# EAGLE board cadiz_mb_20140206_4_5033-69s_2_polygoned (EAGLE 6.1)
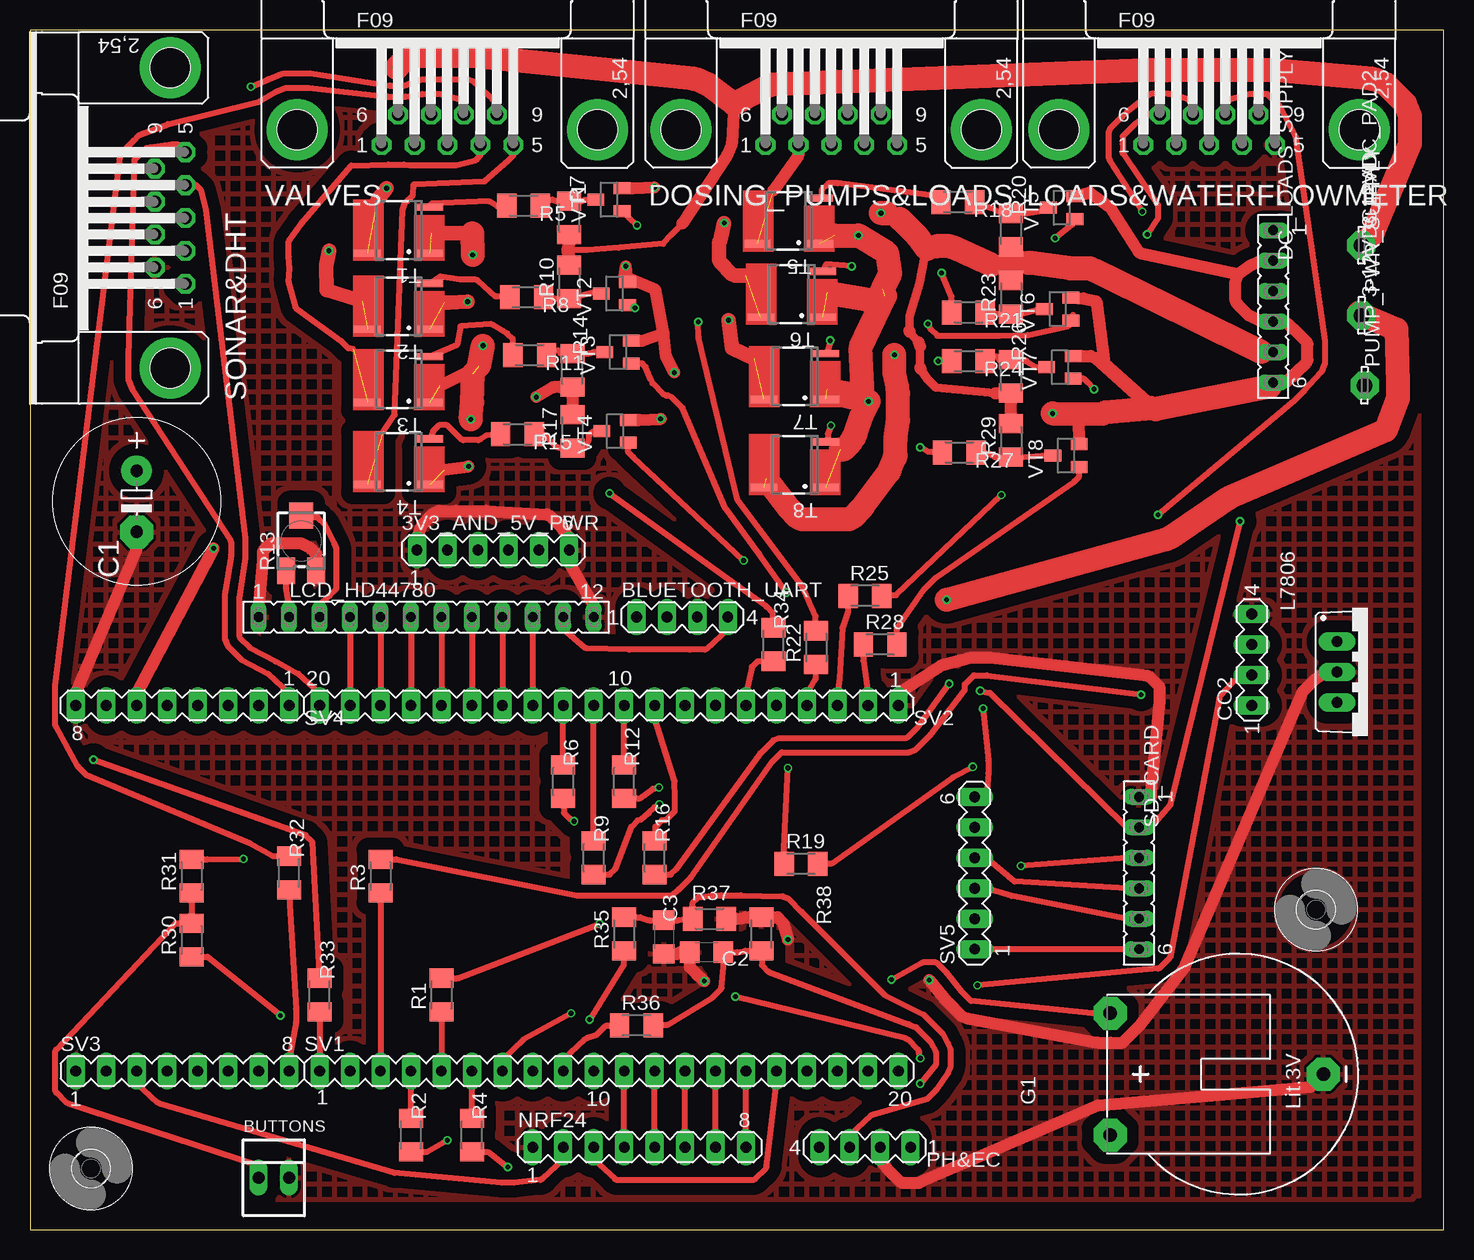
[diagram p0: board, top side]
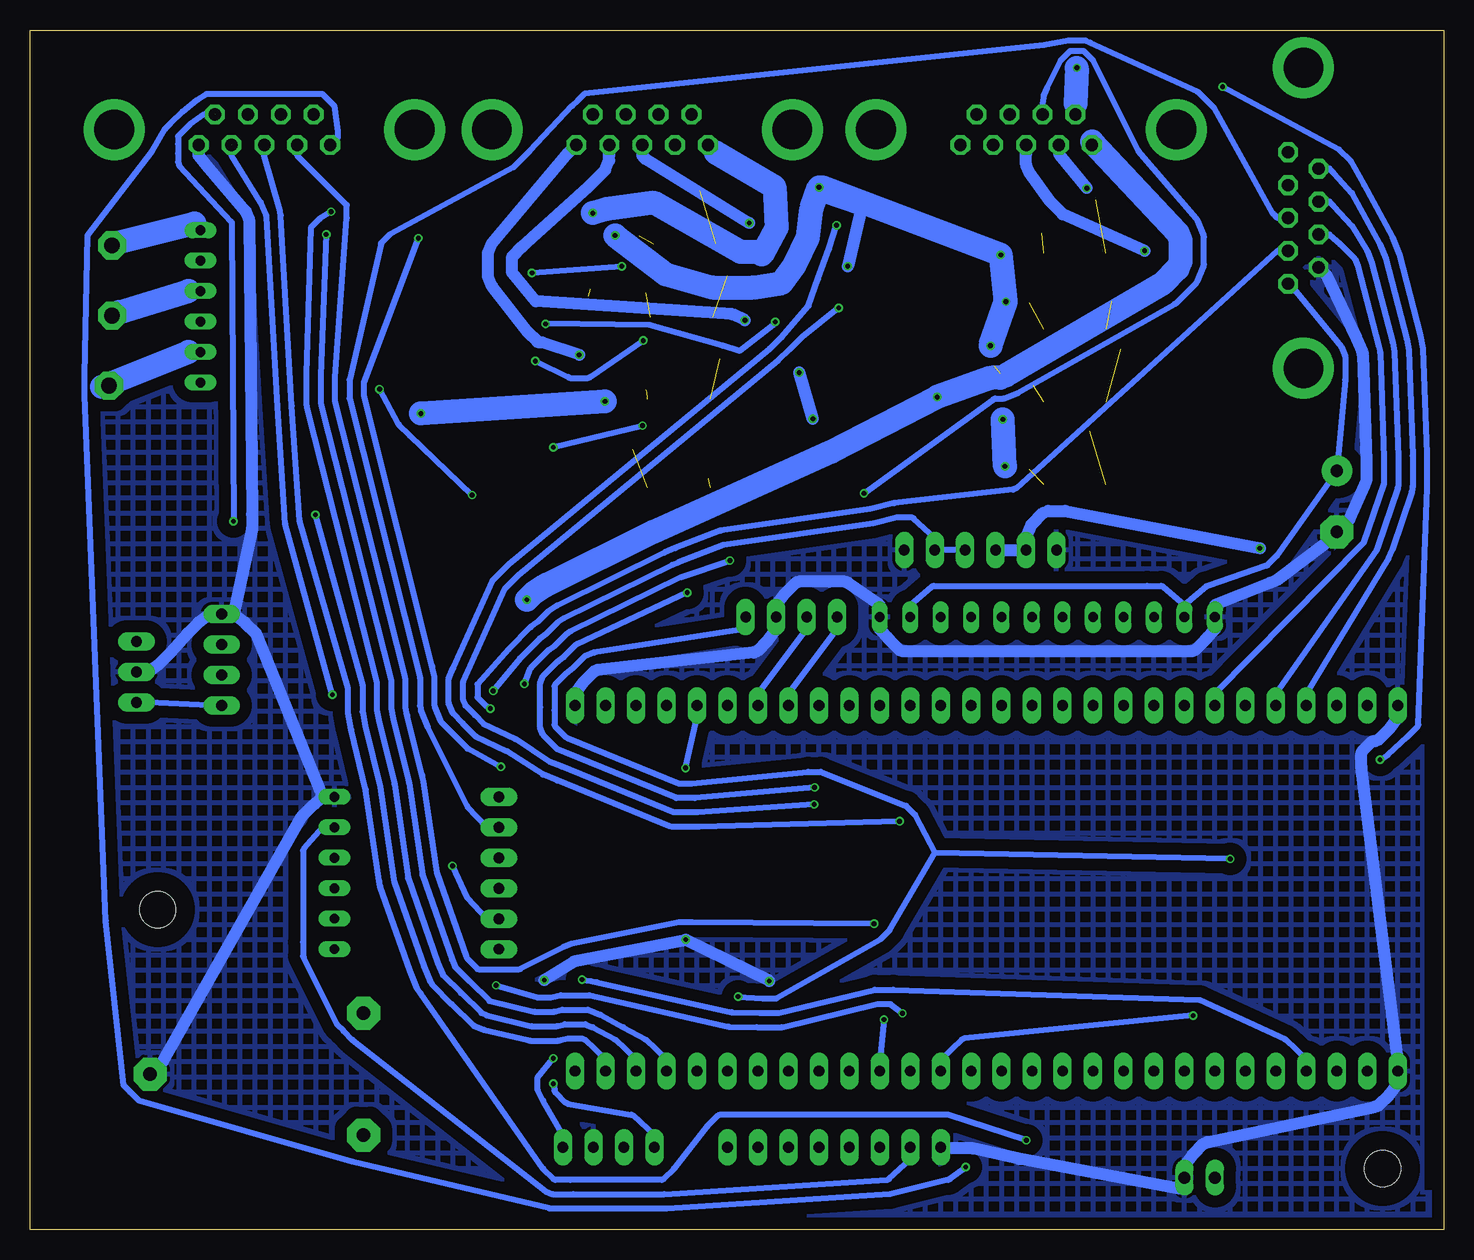
[diagram p1: board, bottom side, seen from below]

Size 117.84 x 100 mm. Coordinates in mm from the lower left corner, seen from the top.
Outline: 0,0 117.84,0 117.84,100 0,100 0,0
Copper layers 1+16: Top 0.035mm / dielectric 0.15mm / Bottom 0.035mm
Design rules: minimum track width 0.5mm, minimum drill 0.6mm, track to track 0.7mm, track to pad 8mil, pad to pad 8mil, via to via 8mil, smd to smd 8mil, copper to edge 1mm, drill to drill 8mil, minimum pad ring 0.1mm, minimum via ring 0.1mm, stop-mask expansion 4mil, vias tented up to drill 0mil, thermal gap 10mil
Net classes: 0 default: width 0.5 mm, clearance 0.7 mm; 1 48A: width 0.5 mm, clearance 0.7 mm to class 0, clearance 0.7 mm; 2 16A: width 0.5 mm, clearance 0.7 mm to class 0, clearance 0.7 mm to class 1, clearance 0.7 mm; 3 1A: width 1 mm, clearance 0.7 mm to class 0, clearance 0.7 mm to class 1, clearance 0.7 mm to class 2, clearance 1 mm; 4 3A: width 2 mm, clearance 0.7 mm to class 0, clearance 0.7 mm to class 1, clearance 0.7 mm to class 2, clearance 0.7 mm to class 3, clearance 1 mm

## Footprints (pad centres in the part's own frame; a part is rotated, then mirrored left to right if it is on the bottom)
SOLPAD$ = drill 1.321 pad 2.337 octagon: MP 0,0
CON-LSTB$ = drill 0.9 pad 1.524 long: 1 -6.35,0; 2 -3.81,0; 3 -1.27,0; 4 1.27,0; 5 3.81,0; 6 6.35,0
CON-LSTB$' = drill 0.9 pad 1.524 long: 1 -3.81,0; 2 -1.27,0; 3 1.27,0; 4 3.81,0
CON-MOLEX$ = drill 1 pad 1.508 long: 1 -1.27,0; 2 1.27,0
RCL$ = drill 1.016 pad 2.54: + -2.54,0 | drill 1.016 pad 2.749 octagon: - 2.54,0
RESISTOR$ = smd 1.6 x 1.8: 1 -1.4,0; 2 1.4,0
CON-LSTA$ = drill 0.813 pad 1.321 long: 1 -6.35,0; 2 -3.81,0; 3 -1.27,0; 4 1.27,0; 5 3.81,0; 6 6.35,0
CON-SUBD$ = drill 1.016 pad 1.649 octagon: 1 -5.486,-1.27; 2 -2.743,-1.27; 3 0,-1.27; 4 2.743,-1.27; 5 5.486,-1.27; 6 -4.115,1.27; 7 -1.372,1.27; 8 1.372,1.27; 9 4.115,1.27 | drill 3.302 pad 5.08: G1 -12.522,0; G2 12.522,0
BATTERY$ = drill 1.118 pad 2.749 octagon: + 5.08,10.795; +@1 -5.08,10.795; - 0,-6.985
HOLES$ = hole 3: 0,0
L78XX$ = drill 0.9 pad 1.524 long: GND 0,0; IN -2.54,0; OUT 2.54,0
CON-LSTA$' = drill 0.813 pad 1.321 long: 1 -13.97,0; 2 -11.43,0; 3 -8.89,0; 4 -6.35,0; 5 -3.81,0; 6 -1.27,0; 7 1.27,0; 8 3.81,0; 9 6.35,0; 10 8.89,0; 11 11.43,0; 12 13.97,0
CON-LSTB$'' = drill 0.9 pad 1.524 long: 1 -8.89,0; 2 -6.35,0; 3 -3.81,0; 4 -1.27,0; 5 1.27,0; 6 3.81,0; 7 6.35,0; 8 8.89,0
RESISTOR$' = smd 1.6 x 2: 1 -1.4,0; 2 1.4,0
RESISTOR$'' = smd 1.5 x 2.2: 1 -1.25,-2.5; 3 1.25,-2.5 | smd 1.98 x 2.17: 2 0,2.1
CON-LSTB$''' = drill 0.9 pad 1.524 long: 1 -24.13,0; 2 -21.59,0; 3 -19.05,0; 4 -16.51,0; 5 -13.97,0; 6 -11.43,0; 7 -8.89,0; 8 -6.35,0; 9 -3.81,0; 10 -1.27,0; 11 1.27,0; 12 3.81,0; 13 6.35,0; 14 8.89,0; 15 11.43,0; 16 13.97,0; 17 16.51,0; 18 19.05,0; 19 21.59,0; 20 24.13,0
FDS6680A$ = smd 0.6 x 2.2: DRAIN -1.905,2.6; GATE 1.905,-2.6; SOURCE -1.905,-2.6
TRANSISTOR$ = smd 1 x 1.4: 1 -0.95,-1.1; 2 0.95,-1.1; 3 0,1.1

## Placement (x,y rotation side)
3-12VDC_PAD  LSP13  [SOLPAD$]  111,76.2 270 top
3-12VDC_PAD2  LSP13  [SOLPAD$]  111,82.04 270 top
3V3_AND_5V_PWR  [CON-LSTB$]  38.61,56.64 0 top
BLUETOOTH_UART  [CON-LSTB$']  54.36,51.05 0 top
BUTTONS  [CON-MOLEX$]  20.33,4.32 0 top
C1  [RCL$]  8.89,60.71 270 top
C2  [RESISTOR$]  56.39,23.11 180 top
C3  [RESISTOR$]  52.84,24.38 270 top
CO2  [CON-LSTB$']  101.85,47.5 90 top
DC_LOADS_SUPPLY  [CON-LSTA$]  103.63,76.96 270 top
DOSING_PUMPS&LOADS  [CON-SUBD$]  66.8,91.69 0 top
G1  CR2032H  [BATTERY$]  100.84,12.95 90 top
H2  [HOLES$]  5.08,5.08 0 top
H3  [HOLES$]  107.19,26.67 0 top
L7806  L78XX  [L78XX$]  108.97,46.48 270 top
LCD_HD44780  [CON-LSTA$']  33.03,51.05 0 top
LOADS&WATERFLOWMETER  [CON-SUBD$]  98.3,91.69 0 top
NRF24  [CON-LSTB$'']  50.81,6.86 0 top
PH&EC  [CON-LSTB$']  69.6,6.86 180 top
PUMP_PWR_SUPPLY  LSP13  [SOLPAD$]  111.25,70.36 270 top
R1  [RESISTOR$']  34.3,19.56 90 top
R2  [RESISTOR$']  31.76,7.87 270 top
R3  [RESISTOR$']  29.22,29.46 90 top
R4  [RESISTOR$']  36.84,7.87 270 top
R5  [RESISTOR$']  41.15,85.34 180 top
R6  [RESISTOR$']  44.46,37.34 270 top
R7  [RESISTOR$']  44.96,84.33 270 top
R8  [RESISTOR$']  41.4,77.72 180 top
R9  [RESISTOR$']  47,30.99 270 top
R10  [RESISTOR$']  44.96,78.99 90 top
R11  [RESISTOR$']  41.66,72.9 180 top
R12  [RESISTOR$']  49.54,37.34 270 top
R13  10k  [RESISTOR$'']  22.61,57.4 0 top
R14  [RESISTOR$']  45.21,71.63 270 top
R15  [RESISTOR$']  40.64,66.29 180 top
R16  [RESISTOR$']  52.08,30.99 270 top
R17  [RESISTOR$']  45.21,66.55 90 top
R18  [RESISTOR$']  77.35,85.67 180 top
R19  [RESISTOR$']  64.27,30.48 0 top
R20  [RESISTOR$']  81.79,83.31 270 top
R21  [RESISTOR$']  78.23,76.45 180 top
R22  [RESISTOR$']  65.54,48.51 90 top
R23  [RESISTOR$']  81.79,77.72 90 top
R24  [RESISTOR$']  78.23,72.39 180 top
R25  [RESISTOR$']  69.6,52.83 0 top
R26  [RESISTOR$']  81.79,71.12 270 top
R27  [RESISTOR$']  77.47,64.77 180 top
R28  [RESISTOR$']  70.87,48.77 0 top
R29  [RESISTOR$']  81.79,65.79 90 top
R30  100  [RESISTOR$']  13.47,24.13 90 top
R31  15k  [RESISTOR$']  13.47,29.46 90 top
R32  [RESISTOR$']  21.6,29.72 270 top
R33  [RESISTOR$']  24.14,19.56 270 top
R34  [RESISTOR$']  61.98,48.77 270 top
R35  [RESISTOR$']  49.54,24.64 90 top
R36  [RESISTOR$']  50.55,17.02 0 top
R37  15k  [RESISTOR$']  56.65,25.91 180 top
R38  15k  [RESISTOR$']  60.97,24.64 270 top
SD_CARD  [CON-LSTA$]  92.46,29.72 270 top
SONAR&DHT  [CON-SUBD$]  11.68,84.33 90 top
SV1  [CON-LSTB$''']  48.27,13.21 0 top
SV2  [CON-LSTB$''']  48.27,43.69 180 top
SV3  [CON-LSTB$'']  12.71,13.21 0 top
SV4  [CON-LSTB$'']  12.71,43.69 180 top
SV5  [CON-LSTB$]  78.75,29.72 90 top
T1  FDS6680A  [FDS6680A$]  30.73,83.31 90 top
T2  FDS6680A  [FDS6680A$]  30.73,76.96 90 top
T3  FDS6680A  [FDS6680A$]  30.73,70.87 90 top
T4  FDS6680A  [FDS6680A$]  30.73,64.01 90 top
T5  FDS6680A  [FDS6680A$]  63.25,84.07 90 top
T6  FDS6680A  [FDS6680A$]  63.5,77.98 90 top
T7  FDS6680A  [FDS6680A$]  63.75,71.12 90 top
T8  FDS6680A  [FDS6680A$]  63.75,63.75 90 top
VALVES  [CON-SUBD$]  34.8,91.69 0 top
VT1  3904  [TRANSISTOR$]  48.26,85.85 90 top
VT2  3904  [TRANSISTOR$]  48.72,78.02 90 top
VT3  3904  [TRANSISTOR$]  49.02,73.15 90 top
VT4  3904  [TRANSISTOR$]  48.77,66.55 90 top
VT5  3904  [TRANSISTOR$]  86,85.18 90 top
VT6  3904  [TRANSISTOR$]  85.67,76.74 90 top
VT7  3904  [TRANSISTOR$]  85.85,71.88 90 top
VT8  3904  [TRANSISTOR$]  86.36,64.52 90 top

## Library data of the parts
3-12VDC_PAD 3-12VDC_PAD2 PUMP_PWR_SUPPLY = $LSP13
3V3_AND_5V_PWR SV5 = $MA06-1
BLUETOOTH_UART CO2 PH&EC = $MA04-1
BUTTONS = $22-23-2021
C1 = $E5-13
C2 C3 = $C1206
DC_LOADS_SUPPLY SD_CARD = $FE06
DOSING_PUMPS&LOADS LOADS&WATERFLOWMETER SONAR&DHT VALVES = $F09HP
G1 = $CR2032H
H2 H3 = $3,0
L7806 = $TO220
LCD_HD44780 = $FE12
NRF24 SV3 SV4 = $MA08-1
R1-R12 R14-R38 = $M1206
R13 = $RTRIM3374
SV1 SV2 = $MA20-1
T1-T8 = $SO8
VT1-VT8 = $SOT23

## Nets
+3V3: 3V3_AND_5V_PWR.4 3V3_AND_5V_PWR.5 LOADS&WATERFLOWMETER.9 NRF24.2 SD_CARD.2 SV3.3
+5V: BLUETOOTH_UART.4 C1.+ LCD_HD44780.2 LCD_HD44780.11 PH&EC.1 R13.1 R31.2 SONAR&DHT.1
+12V: L7806.IN
GND [3A]: 3V3_AND_5V_PWR.1 3V3_AND_5V_PWR.6 BLUETOOTH_UART.3 BUTTONS.2 C1.- C2.2 C3.2 CO2.4 G1.- L7806.GND LCD_HD44780.1 LCD_HD44780.12 LOADS&WATERFLOWMETER.5 NRF24.1 PH&EC.2 R13.3 R37.1 R38.1 SD_CARD.1 SONAR&DHT.6 SV2.1 SV3.1 SV4.8
GND1 [3A]: DC_LOADS_SUPPLY.2 DC_LOADS_SUPPLY.4 DC_LOADS_SUPPLY.6 T1.SOURCE T2.SOURCE T3.SOURCE T4.SOURCE T5.SOURCE T6.SOURCE T7.SOURCE T8.SOURCE VT1.2 VT2.2 VT3.2 VT4.2 VT5.2 VT6.2 VT7.2 VT8.2
N$1: NRF24.6 SV1.13
N$2: LCD_HD44780.4 SV2.19
N$3: R16.1 SV2.9
N$4: SONAR&DHT.2 SV5.6
N$5: LCD_HD44780.3 R13.2
N$6: G1.+ SV3.4
N$7: LCD_HD44780.5 SV2.18
N$8: LCD_HD44780.6 SV2.17
N$9: LCD_HD44780.7 SV2.16
N$10: LOADS&WATERFLOWMETER.3 R2.2
N$11: LCD_HD44780.8 SV2.15
N$12: R12.1 SV2.10
N$13: LOADS&WATERFLOWMETER.4 R3.2
N$14: LOADS&WATERFLOWMETER.2 R1.2
N$15: LCD_HD44780.9 SV2.14
N$16: LCD_HD44780.10 SV2.13
N$17: SONAR&DHT.3 SV5.5
N$18: R11.1 R14.1 VT3.3
N$19: SD_CARD.6 SV5.1
N$20: SONAR&DHT.7 SV4.2
N$21: SD_CARD.5 SV5.3
N$22: SD_CARD.4 SV5.4
N$23: SONAR&DHT.8 SV4.4
N$24: SD_CARD.3 SV5.2
N$26: R1.1 SV1.5
N$27: R2.1 SV1.4
N$28: R3.1 SV1.3
N$29: R4.1 SV1.6
N$30: SONAR&DHT.9 SV4.5
N$31: LOADS&WATERFLOWMETER.1 R4.2
N$32: R8.2 T2.GATE
N$33: R5.2 T1.GATE
N$34: R6.2 VT1.1
N$35: R9.2 VT2.1
N$36 [1A]: 3V3_AND_5V_PWR.2 3V3_AND_5V_PWR.3 SV4.6
N$37: R11.2 T3.GATE
N$38: R12.2 VT3.1
N$39: R15.2 T4.GATE
N$40: R16.2 VT4.1
N$41: R18.2 T5.GATE
N$42: R19.2 VT5.1
N$43: R21.2 T6.GATE
N$44: R22.2 VT6.1
N$45: R24.2 T7.GATE
N$46: R25.2 VT7.1
N$47: R27.2 T8.GATE
N$48: R28.2 VT8.1
N$49 [3A]: 3-12VDC_PAD.MP DC_LOADS_SUPPLY.3 R14.2 R17.2 VALVES.1
N$50 [3A]: 3-12VDC_PAD2.MP DC_LOADS_SUPPLY.1 R7.2 R10.2 VALVES.6
N$51: R9.1 SV2.11
N$52: R6.1 SV2.12
N$53 [1A]: DC_LOADS_SUPPLY.5 DOSING_PUMPS&LOADS.1 PUMP_PWR_SUPPLY.MP R20.2 R23.2 R26.2 R29.2
N$54: BLUETOOTH_UART.1 SV2.8
N$55: BLUETOOTH_UART.2 SV2.7
N$56: R28.1 SV2.2
N$57: R25.1 SV2.3
N$58: R22.1 SV2.4
N$59: R19.1 SV2.5
N$60 [3A]: DOSING_PUMPS&LOADS.5 T8.DRAIN
N$61 [3A]: DOSING_PUMPS&LOADS.4 T7.DRAIN
N$62 [3A]: DOSING_PUMPS&LOADS.3 T6.DRAIN
N$63 [3A]: DOSING_PUMPS&LOADS.2 T5.DRAIN
N$64: BUTTONS.1 R30.2 R31.1
N$65: NRF24.7 SV1.14
N$66: NRF24.5 SV1.12
N$67: R30.1 SV1.8
N$68: T4.DRAIN VALVES.5
N$69: T3.DRAIN VALVES.4
N$70 [3A]: T2.DRAIN VALVES.3
N$71 [3A]: T1.DRAIN VALVES.2
N$72: R32.1 VALVES.8
N$73: R33.1 VALVES.9
N$74: R34.1 VALVES.7
N$75: LOADS&WATERFLOWMETER.7 SV1.18
N$76: LOADS&WATERFLOWMETER.8 SV1.19
N$77: LOADS&WATERFLOWMETER.6 SV1.17
N$78: SONAR&DHT.5 SV4.1
N$79: SONAR&DHT.4 SV2.20
N$80: NRF24.4 SV1.11
N$81: NRF24.8 SV1.15
N$82: NRF24.3 SV1.16
N$83: R33.2 SV1.1
N$84: R32.2 SV3.8
N$85: R34.2 SV2.6
N$86: C2.1 PH&EC.4 R36.2 R38.2
N$87: C3.1 PH&EC.3 R35.2 R37.2
N$88: R35.1 SV1.10
N$89: R36.1 SV1.9
N$90: CO2.1 L7806.OUT
N$91: CO2.2 SV1.7
VT1: R5.1 R7.1 VT1.3
VT2: R8.1 R10.1 VT2.3
VT4: R15.1 R17.1 VT4.3
VT5: R18.1 R20.1 VT5.3
VT6: R21.1 R23.1 VT6.3
VT7: R24.1 R26.1 VT7.3
VT8: R27.1 R29.1 VT8.3

## Tracks (layer width: path | path; a pad name or v marks a point on that pad's centre or on a via)
+3V3  (via drill 0.4 pad 0.7)  (1 unrouted)
  Top 0.5: v100.87,59.04 95.07,35.48 95.01,35.35 93.46,33.53 SD_CARD.2 91.46,33.53 80,44.73 79.99,44.73 v79.22,44.91 | NRF24.2 44.46,5.86 42.7,4.21 42.53,4.15 40.36,3.91 39.3,3.91 30.36,4.72 10.82,10.49 10.66,10.56 8.9,12.21 SV3.3
  Bottom 0.5: LOADS&WATERFLOWMETER.9 102.92,92.96 103.17,92.96 103.31,92.96 104.49,92.14 105.05,91.58 105.5,91.13 105.5,90.5 105.5,89.72 105.5,88.99 105.38,88.7 101.08,84.03 101.02,83.9 v100.87,59.04 | SD_CARD.2 93.46,33.53 95.01,31.71 95.07,31.58 95.07,23.96 95.07,22.78 95.01,22.65 92.26,17.11 91.71,16.56 90.96,15.81 74.87,3.2 74.26,2.94 72.56,2.94 64.94,2.94 46.38,4.15 46.22,4.21 44.46,5.86 NRF24.2 | 3V3_AND_5V_PWR.4 3V3_AND_5V_PWR.5 42.42,57.64 44.18,59.29 44.35,59.35 45.57,59.35 47.54,58.87 60.02,57.07 63.82,55.59 64.28,55.41 73.34,50.95 73.87,50.59 74.83,49.63 75.32,49.28 76.98,47.62 v79.22,44.91
+5V  (via drill 0.4 pad 0.7)
  Top 0.5: R31.2 14.22,30.86 14.47,30.86 14.8,30.86 v17.78,30.9 | LCD_HD44780.2 21.6,52.05 21.36,53.49 21.36,53.8 21.36,54.05 R13.1 | v74.22,14.28 74.11,14.82 74.04,14.99 73.17,15.85 73.01,15.92 v58.81,19.41 | BLUETOOTH_UART.4 58.17,50.05 56.41,48.41 56.24,48.34 55.02,48.34 49.94,48.34 46.41,48.44 46.28,48.5 44.46,50.05 LCD_HD44780.11
  Bottom 0.5: v17.78,30.9 42.4,31.38 | BLUETOOTH_UART.4 58.17,50.05 70.81,48.1 71.6,47.77 72.58,46.79 73.17,46.33 74.04,45.47 74.11,45.3 74.11,43.3 74.11,42.08 74.04,41.91 73.17,41.04 73.01,40.98 63.72,37.17 62.66,37.17 52.96,38.15 51.9,38.15 44.82,35.33 44.81,35.33 44.06,34.58 42.4,31.38 | SONAR&DHT.1 12.59,78.48 12.41,78.3 12.32,78.21 8.53,73.59 8.19,72.77 8.19,70.84 C1.+ 13.88,56.17 14.67,55.38 14.74,55.35 19.65,53.66 19.78,53.61 21.6,52.05 | LCD_HD44780.11 44.46,52.05 42.64,53.61 42.51,53.66 24.73,53.66 23.55,53.66 23.42,53.61 21.6,52.05 | 21.6,52.05 LCD_HD44780.2 21.6,52.05 | v58.81,19.41 56.76,19.26 55.64,19.26 55.57,19.29 46.93,24.19 46.18,24.94 42.4,31.38 | PH&EC.1 73.41,7.86 75.06,10.75 75.5,11.61 75.51,11.63 75.51,12.69 75.5,12.7 v74.22,14.28
GND  (via drill 0.4 pad 0.7)
  Top 1: v56.2,20.71 55.46,21.41 54.99,21.88 54.99,22.21 54.99,22.71 C2.2 54.69,23.11 54.19,23.11 54.07,22.99 53.74,22.98 53.24,22.98 C3.2 | v74.97,20.8 76.46,18.99 77.62,17.83 78.16,17.6 89.02,15.56 90.07,15.56 91.07,15.56 91.81,16.31 92.51,17.01 96.24,21.83 106.11,44.86 107.05,45.8 107.97,46.48 L7806.GND | SD_CARD.1 93.46,36.07 94.18,44.01 94.18,45.17 94.13,45.27 93.31,46.09 93.21,46.14 80.04,47.66 78.41,47.66 76.04,47.04 75.93,46.99 72.4,44.69 SV2.1 | PH&EC.2 70.87,5.86 71.56,4.94 72.49,4 72.75,3.9 74.07,3.9 74.33,4 89.02,10.35 106.77,11.9 106.92,12.06 107.28,12.41 G1.- | R37.1 58.35,25.91 58.85,25.91 59.26,25.92 59.63,26.04 59.97,26.04 60.47,26.04 R38.1 61.47,26.04 61.97,26.04 62.3,26.04 62.77,25.57 v63.18,24.16 | SV4.8 3.82,44.69 8.89,56.68 8.89,56.9 8.89,57.4 C1.- | R13.3 23.86,55.5 23.86,56 23.86,56.31 23.42,56.75 22.6,57.2 21.1,57.2 20.11,57.2 19.41,56.5 19.41,55.74 19.06,52.05 LCD_HD44780.1 | 3V3_AND_5V_PWR.1 32.26,57.64 32.53,58.36 32.69,58.73 33.71,59.75 34.08,59.9 35.52,59.9 38.06,59.9 43.08,59.6 43.34,59.5 44.27,58.56 44.96,57.64 3V3_AND_5V_PWR.6 44.96,55.64 47,52.05 LCD_HD44780.12
  Bottom 1: v56.2,20.71 v63.18,24.16 72.39,22.38 72.5,22.34 v74.97,20.8 | LOADS&WATERFLOWMETER.5 103.78,90.16 103.78,89.66 103.78,89.53 102.95,88.49 99.84,84.85 99.57,84.19 99.32,59.62 99.32,58.46 100.85,51.31 | 100.85,51.31 CO2.4 | G1.- 107.28,13.5 106.92,13.85 106.77,14.01 95.22,34.39 94.32,35.3 93.46,36.07 | 93.46,36.07 SD_CARD.1 93.46,36.07 | SV4.8 3.82,42.69 4.5,41.77 5.44,40.83 5.7,40.73 5.87,40.72 5.98,40.67 6.8,39.85 6.84,39.75 6.84,38.59 3.82,14.21 SV3.1 3.82,12.21 4.5,11.29 5.44,10.35 5.7,10.24 19.72,7.27 19.97,7.17 20.91,6.23 21.6,5.32 BUTTONS.2 21.6,3.32 35.37,5.88 39.25,6.76 41.92,6.76 NRF24.1 | SV2.1 72.4,44.69 71.71,45.61 70.78,46.54 70.52,46.65 57.51,48.09 57.25,48.2 56.32,49.13 55.63,50.05 BLUETOOTH_UART.3 55.63,52.05 54.95,52.97 54.01,53.91 53.75,54.02 51.21,54.02 49.89,54.02 49.63,53.91 47,52.05 LCD_HD44780.12 47,50.05 46.23,49.19 45.32,48.28 45.1,48.19 43.81,48.19 20.95,48.19 20.73,48.28 19.83,49.19 19.06,50.05 LCD_HD44780.1 19.06,52.05 14.46,53.9 13.85,54.15 9.94,57.11 9.79,57.27 9.43,57.62 C1.- 8.35,58.71 7.99,59.06 7.84,59.22 6.6,62.04 6.42,62.48 6.42,64.01 6.74,72.94 6.79,73.17 7.26,74.31 9.78,79.58 9.88,79.67 10.23,80.03 SONAR&DHT.6 | L7806.GND 107.97,46.48 107.05,47.17 106.11,48.1 104.71,49.69 103.77,50.62 102.85,51.31 CO2.4 | CO2.4 100.85,51.31 | 100.85,51.31 99.93,50.62 99,49.69 98.89,49.43 93.46,36.07
  pour Bottom (hatched): 1.78,99.06 117.09,99.06 117.09,0.76 0.76,0.76 0.76,3.05 1.78,3.05
  pour Top (hatched): 115.82,97.79 2.54,97.79 2.54,2.54 115.32,2.54 115.32,2.79 115.82,2.79
GND1  (via drill 0.4 pad 0.7)  (11 unrouted)
  Top 1: VT2.2 v49.67,80.31 49.58,79.45 52.13,78.35 52.83,74.72 | 34.19,70.36 37.44,71.98 | VT5.2 88.33,86.44 90.03,85.23 92.45,81.46 92.56,81.41 100.73,79.65 | VT1.2 49.56,86.8 50.06,86.8 50.27,86.8 v52.06,86.89 | VT7.2 87.15,72.83 87.65,72.83 88.4,72.83 88.82,72.66 93.43,68.48 93.84,68.38 89.58,72.23 88.88,77.38 87.84,77.62 VT6.2 | 34.54,63.35 34.55,63.35 v36.55,63.62 | 100.73,79.65 100.47,78.93 100.47,77.53 100.61,77.2 101.6,76.21 102.63,75.69 DC_LOADS_SUPPLY.4 104.63,75.69 105.49,74.92 106.4,74.01 106.49,73.79 106.49,72.51 106.4,72.29 105.49,71.38 104.63,70.61 DC_LOADS_SUPPLY.6 103.35,70.26 | DC_LOADS_SUPPLY.2 102.63,80.77 101.6,80.26 100.73,79.65 | VT8.2 87.46,65.97 87.46,66.26 87.35,67.97 | v53.71,71.45 53.02,72.83 52.83,74.72 | VT4.2 50.07,67.5 50.57,67.5 50.77,67.5 v52.57,67.58 | VT3.2 50.32,74.1 50.82,74.1 51.03,74.1 52.83,74.72
  Top 1.2: 34.54,77.27 34.94,77.27 v36.49,77.35 | 33.49,83.05 36.87,83.05
  Top 2: 67.06,82.87 v69.06,82.87 71.48,81.39 71.72,79.69 71.11,78.41 70.64,77.41 66.48,78.11 | 66.41,69.87 v69.91,69.03 69.37,67.95 69.37,67.94 68.82,66.34 68.7,66.05 68.39,65.57 67.84,65.02 67.56,65.02 | 66.48,70.01 69.42,69.48 69.24,73.53 71.28,77.83 | v85.25,68.03 87.35,67.97 89.38,68.01 89.67,68.13 93.43,68.48 | v36.74,67.54 36.87,68.95 36.94,71.35 | 36.87,83.05 v36.91,81.25 | 103.35,70.26 93.84,68.38 | 37.44,71.98 v37.76,73.68
  Bottom 1: v52.57,67.58 v53.71,71.45 | 48.43,85.53 v49.67,80.31
  Bottom 2: v52.06,86.89 51.59,86.62 48.43,85.53 | v52.06,86.89 51.78,86.89 v36.91,81.25 v36.49,77.35 v37.76,73.68 | v36.55,63.62 v36.74,67.54 | v69.91,69.03 v85.25,68.03 | v69.06,82.87 64.85,79.63 60.95,78.53 57.55,78.53 55.17,78.9 54.08,80.42 52.98,82.67 52.68,85.11 v52.06,86.89
N$1
  Top 0.5: NRF24.6 54.62,7.86 54.62,12.21 SV1.13
N$2
  Top 0.5: LCD_HD44780.4 26.68,50.05 26.68,44.69 SV2.19
N$3
  Top 0.5: R16.1 52.13,32.94 52.13,33.19 52.13,33.58 52.68,34.14 53,34.14 53.01,34.14 53.76,34.89 53.77,34.91 53.77,35.97 53.73,37.38 52.08,42.69 SV2.9
N$4  (via drill 0.4 pad 0.7)
  Top 0.5: v79.46,43.43 79.89,39.1 79.89,38.04 79.75,36.07 SV5.6
  Bottom 0.5: SONAR&DHT.2 13.47,81.58 13.72,81.58 13.85,81.58 35.64,61.78 35.89,61.67 45.81,60.55 47.78,60.07 60.26,58.27 64.06,56.8 64.95,56.42 73.88,52.02 73.93,51.99 74.63,51.53 75.51,50.65 76.09,50.21 77.92,48.38 80.52,45.45 80.53,45.44 80.53,44.38 80.52,44.36 79.77,43.61 v79.46,43.43
N$5
  Top 0.5: LCD_HD44780.3 24.14,52.05 25,52.85 25.56,53.41 25.56,54.2 25.56,56.76 25.38,57.2 24.55,58.81 23.99,59.37 23.6,59.37 23.35,59.37 R13.2
N$6  (via drill 0.4 pad 0.7)
  Top 0.5: G1.+ 89.02,18.03 88.77,18.03 88.56,18.03 78.45,19.05 78.44,19.06 77.69,19.81 76.39,21.43 75.59,22.22 75.53,22.25 74.41,22.25 74.34,22.22 v71.81,20.83
  Bottom 0.5: v71.81,20.83 71.1,20.72 70.58,20.62 59.34,18.11 57,18.06 55.41,18.06 47.41,19.99 45.88,19.99 20.35,19.14 20.34,19.13 13.2,15.85 11.44,14.21 SV3.4
N$7
  Top 0.5: LCD_HD44780.5 29.22,50.05 29.22,44.69 SV2.18
N$8
  Top 0.5: LCD_HD44780.6 31.76,50.05 31.76,44.69 SV2.17
N$9
  Top 0.5: LCD_HD44780.7 34.3,50.05 34.3,44.69 SV2.16
N$10  (via drill 0.4 pad 0.7)
  Top 0.5: R2.2 32.51,6.47 32.76,6.47 33.09,6.47 v34.78,7.43
  Bottom 0.5: v34.78,7.43 41.3,9.57 42.53,9.57 60.31,9.57 60.48,9.5 61.34,8.64 64.15,5.08 65.01,4.21 65.18,4.15 72.8,4.15 74.02,4.15 74.19,4.21 75.06,5.08 85.27,19.68 85.57,20.12 86.16,21.55 88.63,28.61 88.72,29.06 89.84,36.66 91.05,41.68 91.33,43.06 91.33,45.12 95.35,59.06 96,68.69 96.92,84.53 96.99,84.9 98.3,89.53 98.3,89.66 98.3,89.91 LOADS&WATERFLOWMETER.3
N$11
  Top 0.5: LCD_HD44780.8 36.84,50.05 36.84,44.69 SV2.15
N$12
  Top 0.5: R12.1 49.54,39.29 49.54,39.54 49.54,42.69 SV2.10
N$13  (via drill 0.4 pad 0.7)  (1 unrouted)
  Top 0.5: R3.2 29.97,30.86 30.22,30.86 30.55,30.86 45.6,27.84 52.68,27.84 53.47,27.84 54.1,28.37 55.09,29.36 61.89,39.02 62.64,39.77 62.66,39.77 73.25,39.77 73.86,40.03 75.06,41.23 77.91,44.94 77.92,44.96 77.92,45.44 77.93,45.45 78.68,46.2 78.69,46.21 79.75,46.21 v92.63,44.59
  Bottom 0.5: v92.63,44.59 96.55,58.82 97.21,68.57 98.12,84.41 98.15,84.55 98.59,85.61 101.04,89.53 101.04,89.66 101.04,89.91 LOADS&WATERFLOWMETER.4
N$14  (via drill 0.4 pad 0.7)
  Top 0.5: R1.2 35.05,20.96 35.3,20.96 35.63,20.96 v47.48,25.49
  Bottom 0.5: v47.48,25.49 62.62,25.62 63.74,25.62 72.68,23.83 73.32,23.57 76.97,21.72 77.14,21.66 79.14,21.66 80.36,21.66 80.53,21.72 81.39,22.59 81.46,22.76 83.92,29.78 85.04,37.35 85.14,37.86 86.39,42.86 86.53,43.54 86.53,45.84 86.62,46.29 92.4,69.05 92.4,71.06 91.43,84.33 91.43,85.39 91.44,85.4 95.56,89.53 95.56,89.66 95.56,89.91 LOADS&WATERFLOWMETER.2
N$15
  Top 0.5: LCD_HD44780.9 39.38,50.05 39.38,44.69 SV2.14
N$16
  Top 0.5: LCD_HD44780.10 41.92,50.05 41.92,44.69 SV2.13
N$17
  Bottom 0.5: SONAR&DHT.3 13.47,84.33 13.72,84.33 13.85,84.33 14.03,84.51 14.22,84.7 19.12,93.48 20.49,94.84 29.48,98.95 29.85,99.11 31.29,99.11 33.31,98.75 71.63,94.68 72.18,94.12 72.63,93.67 76.17,89.91 77.54,88.54 87.83,82.97 88.58,82.22 88.58,82.2 91.2,70.83 91.2,69.29 85.46,46.64 85.33,45.96 85.33,43.66 85.24,43.21 84.68,41.86 81.39,35.29 79.75,33.53 SV5.5
N$18
  Top 0.5: R11.1 43.06,73.1 43.71,73.3 44,73.3 44.21,73.1 44.21,73.03 44.46,73.03 R14.1 45.96,73.03 46.21,73.03 46.54,73.03 47.02,73.15 47.22,73.15 47.47,73.15 VT3.3
N$19
  Top 0.5: SD_CARD.6 91.46,23.37 79.75,23.37 SV5.1
N$20
  Bottom 0.5: SONAR&DHT.7 9.9,82.96 9.65,82.96 9.52,82.96 8.62,82.14 7.41,80.93 7.15,80.31 5.39,73.59 5.29,73.09 4.97,64.28 4.97,62.21 4.97,62.18 6.67,57.25 19.06,44.69 SV4.2
N$21
  Top 0.5: SD_CARD.5 91.46,25.91 81.85,27.81 79.75,28.45 SV5.3
N$22
  Top 0.5: SD_CARD.4 91.46,28.45 82.09,29.01 82.07,29.02 79.75,30.99 SV5.4
N$23
  Bottom 0.5: SONAR&DHT.8 9.9,85.7 9.65,85.7 9.52,85.7 9.34,85.52 9.15,85.33 7.64,83.67 6.37,81.58 5.96,80.58 4.24,73.94 4.09,73.2 3.77,64.4 3.77,62.09 3.82,61.83 5.47,56.94 5.61,56.61 13.98,44.69 SV4.4
N$24  (via drill 0.4 pad 0.7)
  Top 0.5: SD_CARD.3 91.46,30.99 v82.62,30.31
  Bottom 0.5: v82.62,30.31 81.39,27.67 79.75,25.91 SV5.2
N$26
  Top 0.5: R1.1 34.3,17.61 34.3,17.36 34.3,14.21 SV1.5
N$27
  Top 0.5: R2.1 31.76,9.82 31.76,10.07 31.76,12.21 SV1.4
N$28
  Top 0.5: R3.1 29.22,27.51 29.22,27.26 29.22,14.21 SV1.3
N$29
  Top 0.5: R4.1 36.84,9.82 36.84,10.07 36.84,12.21 SV1.6
N$30
  Bottom 0.5: SONAR&DHT.9 9.9,88.44 9.65,88.44 9.52,88.44 9.34,88.26 9.15,88.07 7.64,86.41 5.31,82.14 4.81,80.93 3.07,74.23 2.89,73.32 2.57,64.52 2.57,61.97 2.67,61.48 4.27,56.7 4.59,55.93 11.44,44.69 SV4.5
N$31  (via drill 0.4 pad 0.7)
  Top 0.5: R4.2 37.59,6.47 37.84,6.47 38.17,6.47 v39.83,5.21
  Bottom 0.5: v39.83,5.21 41.14,4.21 41.3,4.15 46.15,2.94 64.74,1.74 72.36,1.74 74.47,1.74 74.53,1.76 90.96,5.65 108.74,10.73 109.49,11.48 110.04,12.03 111.5,25.75 113.28,69.52 113.28,70.31 113.28,71.2 113.03,82.88 107.67,89.91 106.56,91.77 106.11,92.21 105.13,93.2 103.88,94.18 103.12,94.68 94.26,94.68 93.47,94.68 93.03,94.23 92.47,93.67 92.18,91.58 92.18,91.32 92.18,91.06 92.27,90.96 92.45,90.79 LOADS&WATERFLOWMETER.1
N$32
  Top 0.5: R8.2 39.45,77.77 39.2,77.77 38.81,77.78 37.34,79.1 37.12,79.19 35.85,79.19 34.2,79.44 T2.GATE
N$33
  Top 0.5: R5.2 39.2,85.29 38.95,85.29 38.26,85.71 33.45,85.52 T1.GATE
N$34  (via drill 0.4 pad 0.7)
  Top 0.5: v50.6,83.72 VT1.1 | R6.2 44.51,35.39 44.51,35.14 44.51,34.74 45.06,34.19 v45.35,34.03
  Bottom 0.5: v45.35,34.03 62.05,33.57 64.32,33.57 64.54,33.62 73.87,37.43 75.07,37.93 78.05,39.87 80.68,41.12 81.77,42.21 82.55,43 82.92,43.9 82.92,45.91 82.55,46.81 79.28,54.09 78.01,55.36 77.88,55.49 56.16,73.44 55.17,74.38 52.92,77.01 52.13,79.27 51.22,81.76 v50.6,83.72
N$35  (via drill 0.4 pad 0.7)
  Top 0.5: v50.43,76.84 49.88,77.08 VT2.1 | R9.2 47.75,29.59 48,29.59 48.33,29.59 48.8,30.06 50.13,33.58 50.68,34.14 50.93,34.19 51.56,34.72 52.05,35.2 v52.47,35.44
  Bottom 0.5: v52.47,35.44 62.18,34.77 64.19,34.77 73.52,38.59 74.5,39 77.37,40.88 80,42.14 80.75,42.89 81.54,43.68 81.72,44.14 81.72,45.68 81.54,46.13 78.27,53.41 77.33,54.34 77.12,54.56 55.45,72.47 54.5,73.38 53.42,74.46 v50.43,76.84
N$36  (via drill 0.4 pad 0.7)
  Top 1: v15.3,56.8 8.9,44.69 SV4.6
  Bottom 1: 3V3_AND_5V_PWR.3 3V3_AND_5V_PWR.2 34.8,57.64 34.52,58.36 34.37,58.73 33.35,59.75 32.98,59.9 31.54,59.9 v15.3,56.8
N$37
  Top 0.5: R11.2 40.26,73.65 40.26,73.9 40.26,74.23 39.79,74.7 38.6,75.41 38.4,75.49 35.88,75.3 35.6,73.74 T3.GATE
N$38  (via drill 0.4 pad 0.7)
  Top 0.5: v63.05,53.09 60.78,56.31 57.93,60.19 54.4,68.48 53.48,69.41 53.23,69.51 53.05,69.51 52.8,69.62 51.88,70.54 51.77,70.79 51.32,71.91 51.03,72.2 50.82,72.2 50.57,72.2 VT3.1 | R12.2 50.29,35.94 50.54,35.94 50.87,35.94 51.92,36.73 51.94,36.74 v52.43,36.85
  Bottom 0.5: v52.43,36.85 62.42,35.97 63.96,35.97 73.25,39.77 73.86,40.03 75.06,41.23 75.31,41.84 75.31,43.54 75.31,45.54 75.06,46.15 73.86,47.35 73.34,47.73 72.34,48.73 72.2,48.82 v63.05,53.09
N$39
  Top 0.5: R15.2 38.69,66.24 38.44,66.24 38.06,66.21 37.53,65.88 37.36,65.81 36.13,65.81 35.96,65.88 34.78,67.06 34.09,67.06 33.59,66.56 33.48,66.21 33.48,65.96 T4.GATE
N$40  (via drill 0.4 pad 0.7)
  Top 0.5: v59.49,55.77 50.28,64.4 49.87,64.81 49.87,65.1 49.87,65.35 VT4.1 | R16.2 52.83,29.59 53.08,29.59 53.41,29.59 53.88,30.06 60.88,39.7 61.96,40.79 62.42,40.98 73.01,40.98 73.17,41.04 74.04,41.91 v76.62,45.49
  Bottom 0.5: v76.62,45.49 76.5,45.81 76.09,46.8 76.05,46.85 74.56,48.34 74.11,48.66 73.1,49.66 72.77,49.89 63.59,54.39 63.58,54.4 v59.49,55.77
N$41
  Top 0.5: R18.2 76.07,85.08 76.07,85.33 76.07,85.66 75.6,86.13 67.34,87.23 66.55,87.23 66,86.67 66,86.28 66,86.03 T5.GATE
N$42  (via drill 0.4 pad 0.7)
  Top 0.5: v85.46,82.64 86.87,83.77 VT5.1 | R19.2 66.22,30.53 66.47,30.53 66.86,30.53 76.97,37.71 v78.59,38.57
  Bottom 0.5: v78.59,38.57 81.36,40.1 82.79,41.53 83.49,42.24 83.61,42.43 84.08,43.56 84.13,43.77 84.13,46.07 84.3,46.94 90,69.53 90,70.59 v85.46,82.64
N$43  (via drill 0.4 pad 0.7)
  Top 0.5: R21.2 76.83,77.2 76.83,77.45 76.83,77.78 v75.99,79.76 | v68.5,80.31 66.37,80.46 T6.GATE
  Bottom 0.5: v75.99,79.76 v68.5,80.31
N$44  (via drill 0.4 pad 0.7)
  Top 0.5: v74.86,75.51 75.08,75.06 75.64,74.5 76.44,74.5 80.04,74.5 80.83,74.5 83.18,74.57 86.54,75.32 86.95,75.73 86.95,76.02 86.95,76.27 VT6.1 | R22.2 65.49,50.46 65.49,50.71 65.49,51.11 64.34,53.64 58.99,60.82 55.74,74.36 55.74,74.4 v55.7,75.66
  Bottom 0.5: v55.7,75.66 55.91,75.39 58.7,73.24 60.1,73.67 66.18,75.41 v74.86,75.51
N$45  (via drill 0.4 pad 0.7)
  Top 0.5: v66.71,74.11 66.5,73.33 66.5,73.08 T7.GATE | R24.2 76.28,72.4 76.03,72.4 v75.7,72.4
  Bottom 0.5: v75.7,72.4 72.97,71.08 72.72,70.97 71.4,70.97 71.15,71.08 v66.71,74.11
N$46  (via drill 0.4 pad 0.7)
  Top 0.5: v88.7,70.06 88.15,70.64 87.86,70.93 87.65,70.93 87.4,70.93 VT7.1 | R25.2 71.55,52.88 71.8,52.88 72.2,52.88 v80.98,61.23
  Bottom 0.5: v80.98,61.23 86.16,66.19 87.09,67.12 v88.7,70.06
N$47  (via drill 0.4 pad 0.7)
  Top 0.5: v66.77,67.02 66.5,66.35 66.5,65.96 66.5,65.71 T8.GATE | R27.2 75.52,64.82 75.27,64.82 74.88,64.82 v74.21,65.22
  Bottom 0.5: v74.21,65.22 v66.77,67.02
N$48
  Top 0.5: R28.2 72.27,49.52 72.27,49.77 72.27,50.1 74.57,53.41 75.51,54.34 87.05,62.37 87.46,62.78 87.46,63.07 87.46,63.32 VT8.1
N$49  (via drill 0.4 pad 0.7)
  Top 1: v42.21,69.4 43.57,70.19 43.65,70.23 44.21,70.23 44.71,70.23 R14.2 45.21,69.93 45.21,69.43 45.21,68.75 45.21,68.25 R17.2
  Top 2: 3-12VDC_PAD.MP 110.77,76.42 113.9,75.05 114.03,70.52 114.03,69.3 113.97,69.14 113.02,66.62 99.9,60.97 95.02,57.66 94.73,57.53 v76.42,52.5
  Bottom 1: 3-12VDC_PAD.MP 110.37,76.5 | VALVES.1 29.3,90.7 | 104.63,78.23 DC_LOADS_SUPPLY.3
  Bottom 2: v76.42,52.5 75.88,53.04 74.94,53.67 74.71,53.79 65.89,58.15 51.06,64.84 v42.21,69.4 37.7,71.01 36.96,71.01 36.45,71.22 23.41,78.86 22.19,80.09 21.92,80.73 21.92,82.46 22.19,83.1 29.3,90.7 | 110.37,76.5 104.63,78.23
N$50  (via drill 0.4 pad 0.7)
  Top 0.5: 54.39,83.87 53.43,82.91 52.77,82.18 49.09,81.84 46.48,81.66 44.78,81.66
  Top 1: R10.2 44.96,80.69 44.96,81.19 44.78,81.66 44.96,82.13 44.96,82.63 R7.2 | 58.69,93.83 58.52,90.63 58.5,90.54 58.08,89.53 54.39,83.87
  Top 2: v30.57,96.85 31.01,97.3 31.05,97.33 32.02,97.73 32.31,97.81 32.37,97.83 34.48,97.83 36.91,97.83 55.35,95.93 55.44,95.92 56.45,95.5 56.52,95.45 58.69,93.83 61.6,95.36 61.76,95.43 93.02,96.63 94.72,96.63 103.58,96.63 111.89,95.93 111.98,95.92 112.99,95.5 113.06,95.45 114.57,93.94 114.62,93.86 115.04,92.85 115.06,92.76 115.06,90.63 115.04,90.54 114.62,89.53 111.89,82.94 111.76,82.81 111.05,82.1 3-12VDC_PAD2.MP
  Bottom 1: 3-12VDC_PAD2.MP 110.93,82.19 | 30.68,93.86 30.68,93.73 30.68,93.23 VALVES.6 | 104.11,83.88 DC_LOADS_SUPPLY.1
  Bottom 2: v30.57,96.85 30.68,93.86 | 110.93,82.19 104.11,83.88
N$51
  Top 0.5: R9.1 47,32.94 47,33.19 47,42.69 SV2.11
N$52
  Top 0.5: R6.1 44.46,39.29 44.46,39.54 44.46,42.69 SV2.12
N$53  (via drill 0.4 pad 0.7)
  Top 0.7: 74.79,81.74 74.56,81.01 74.16,78.84 73.3,76.09 73.3,74.93 | 74.23,71.74 74.83,70.89 75.53,70.19 80.46,69.72 | 74.2,73.62 74.2,71.83 | 73.35,74.82 74.06,73.94
  Top 1: 80.12,80.42 81.7,80.42 R23.2 81.79,79.42 81.79,79.92 | DC_LOADS_SUPPLY.5 102.63,73.15 | R29.2 81.79,67.49 81.79,67.99 81.79,68.92 81.79,69.42 R26.2 81.29,69.72 80.79,69.72 80.46,69.72 | 71.44,84.73 72.44,84.31 72.5,84.27 | 83.22,80.6 R20.2 81.79,81.61 81.79,81.11 | 86.7,80.12 86.59,80.17 | 88.71,79.98 88.36,80.12 | 75.53,81.98 74.79,81.74 | 76.8,81.93 76.69,81.98 | 74.2,71.83 74.23,71.74 | 74.06,73.94 74.2,73.62 | 73.3,74.93 73.35,74.82
  Top 2: v70.93,84.74 71.36,84.74 71.44,84.73 | 72.5,84.27 74,82.77 74.79,81.74 | 86.59,80.17 83.22,80.6 | 88.36,80.12 86.7,80.12 | 102.63,73.15 88.71,79.98 | 81.79,79.92 81.79,81.11 | 76.69,81.98 75.53,81.98 | 80.12,80.42 76.8,81.93
  Bottom 1: DOSING_PUMPS&LOADS.1 61.13,90.24 60.78,89.89 60.68,89.79 | PUMP_PWR_SUPPLY.MP 111.86,70.25 | 104.63,73.15 DC_LOADS_SUPPLY.5 | 56.82,81.27 57.35,81.49
  Bottom 2: 111.86,70.25 104.63,73.15 | 57.35,81.49 58.57,81.49 65.82,85.59 69.77,85.07 v70.93,84.74 | 60.68,89.79 55.78,86.93 55.6,83.52 56.82,81.27
N$54
  Bottom 0.5: BLUETOOTH_UART.1 50.55,50.05 54.62,44.69 SV2.8
N$55
  Bottom 0.5: BLUETOOTH_UART.2 53.09,50.05 57.16,44.69 SV2.7
N$56
  Top 0.5: R28.1 69.47,48.02 69.47,47.77 69.47,47.44 69.86,44.69 SV2.2
N$57
  Top 0.5: R25.1 68.2,52.08 68.2,51.83 68.2,51.5 67.72,50.16 67.49,45.92 67.32,44.69 SV2.3
N$58
  Top 0.5: R22.1 65.49,46.56 65.49,46.31 65.49,45.92 64.78,44.69 SV2.4
N$59  (via drill 0.4 pad 0.7)
  Top 0.5: R19.1 62.87,31.23 62.87,31.48 62.87,31.81 v63.19,38.47
  Bottom 0.5: v63.19,38.47 62.24,42.69 SV2.5
N$60  (via drill 0.4 pad 0.7)  (1 unrouted)
  Top 2: 61.34,62.6 63.14,60.27 64.08,59.33 64.36,59.21 66.89,59.21 68.23,59.21 68.51,59.33 69.45,60.27 71.57,63.12 71.67,63.27 72.12,64.37 72.16,64.55 72.16,65.89 72.37,67.45 72.37,67.46 72.37,69.7 72.31,70.26 72.06,71.41 v72.06,72.92
  Bottom 1: v72.06,72.92 75.12,73.95 75.43,73.96 75.54,74 76.36,74.82 79.31,78.61 79.66,79.45 79.66,81.4 79.31,82.25 72.92,89.79 72.83,89.89 72.47,90.24 DOSING_PUMPS&LOADS.5
N$61  (via drill 0.4 pad 0.7)  (1 unrouted)
  Top 1.2: 60.35,72.62 58.52,73.49 v58.24,75.81
  Bottom 1: v58.24,75.81 59.29,76.3 75.68,77.38 77.62,79.74 77.66,79.85 77.66,81.01 77.62,81.11 76.8,81.93 71.26,86.95 69.89,88.32 69.55,89.14 69.55,89.53 69.55,89.66 69.55,90.16 DOSING_PUMPS&LOADS.4
N$62  (via drill 0.4 pad 0.7)  (1 unrouted)
  Top 1: 58.77,79.53 58.49,79.65
  Top 1.2: 59.69,79.53 58.77,79.53 | v57.87,83.92 57.55,82.5 57.44,82.23 57.44,82.2 57.44,80.86 57.55,80.59 58.49,79.65
  Bottom 1: DOSING_PUMPS&LOADS.3 66.8,90.16 66.8,89.66 66.8,89.53 66.62,89.35 66.53,89.25 v57.87,83.92
N$63  (1 unrouted)
  Top 1: DOSING_PUMPS&LOADS.2 64.06,90.16 64.06,89.66 64.06,89.53 61.98,86.61
N$64
  Top 0.5: BUTTONS.1 19.06,5.32 3.2,10.49 3.04,10.56 2.17,11.43 2.1,11.6 2.1,12.82 2.1,14.82 2.17,14.99 11.67,25.06 12.14,25.53 12.47,25.53 12.72,25.53 R30.2 13.47,26.08 13.47,26.33 13.47,27.26 13.47,27.51 R31.1
N$65
  Top 0.5: NRF24.7 57.16,7.86 57.16,12.21 SV1.14
N$66
  Top 0.5: NRF24.5 52.08,7.86 52.08,12.21 SV1.12
N$67  (via drill 0.4 pad 0.7)
  Top 0.5: R30.1 14.22,22.73 14.47,22.73 14.8,22.73 v20.88,17.84
  Bottom 0.5: v20.88,17.84 39.99,15.92 40.16,15.85 41.92,14.21 SV1.8
N$68  (1 unrouted)
  Top 0.5: 29.46,66.55 30.41,67.93 31.05,84.98 31.29,85.61 31.5,85.82 31.93,86.25 31.99,87.14 37.9,87.38 39.91,89.16 40.1,89.35 40.28,89.53 40.28,89.66 40.28,89.91 VALVES.5
N$69  (1 unrouted)
  Top 0.5: 26.92,73.41 26.53,73.47 25.97,74.03 22.21,76.78 21.57,79.03 21.64,80.09 21.56,81.08 21.56,82.39 22.63,83.9 24.39,85.94 26.79,88.69 29.88,88.78 31.15,88.78 31.66,88.71 34.72,88.71 35.51,88.71 37.17,89.16 37.36,89.35 37.54,89.53 37.54,89.66 37.54,89.91 VALVES.4
N$70  (via drill 0.4 pad 0.7)  (1 unrouted)
  Top 1.2: 27.71,77.41 24.75,78.33 24.68,80.37 v24.92,81.59
  Bottom 1: v24.92,81.59 31.74,84.64 32.83,85.73 34.52,88.12 34.8,88.78 34.8,89.66 34.8,90.16 VALVES.3
N$71  (via drill 0.4 pad 0.7)  (1 unrouted)
  Top 1.2: 29,85.85 v29.74,86.81
  Bottom 1: VALVES.2 32.05,90.16 32.05,89.66 v29.74,86.81
N$72
  Top 0.5: R32.1 20.85,31.12 20.6,31.12 20.27,31.12 18.33,32.19 4.75,37.87 4,38.62 2.17,41.91 2.1,42.08 2.1,43.3 2.1,45.3 7.5,89.46 7.64,89.78 8.62,90.77 9.07,91.22 9.4,91.36 11.52,92.16 18.95,93.97 18.97,93.98 20.49,94.84 21.31,95.18 23.24,95.18 29.82,94.45 31.32,94.45 32.73,94.66 33.03,94.68 33.82,94.68 34.14,94.68 35.8,94.23 35.98,94.04 36.17,93.86 36.17,93.73 36.17,93.48 VALVES.8
N$73  (via drill 0.4 pad 0.7)
  Top 0.5: v18.42,95.27 19.89,95.9 20.99,96.35 21.16,96.39 23.39,96.39 30,95.37 31.13,95.37 32.42,95.83 32.73,95.88 34.13,95.88 36.55,95.88 36.88,95.74 38.54,94.23 38.73,94.04 38.91,93.86 38.91,93.73 38.91,93.48 VALVES.9 | R33.1 24.09,21.51 24.09,21.76 24.09,22.15 23.55,32.31 22.99,32.87 v5.29,39.17
  Bottom 0.5: v5.29,39.17 4.62,39.6 3.04,41.04 2.17,41.91 2.1,42.08 1.37,61.85 1.37,64.64 1.69,73.44 1.91,74.52 3.65,81.28 4.25,82.71 6.62,87.09 7.74,89.08 8.7,90.04 v18.42,95.27
N$74  (via drill 0.4 pad 0.7)
  Top 0.5: R34.1 61.93,50.72 61.93,50.97 61.93,51.36 61.38,51.92 58.95,53.7 v48.31,61.38
  Bottom 0.5: v48.31,61.38 37.53,69.2 37.36,69.27 36.68,69.27 36.56,69.3 35.52,69.73 22.42,77.16 22.23,77.29 20.62,78.9 20.49,79.09 20.02,80.23 19.97,80.46 19.97,82.73 20.02,82.96 20.49,84.1 20.62,84.29 25.43,89.91 29.19,97.45 29.97,98.23 30.02,98.25 31.11,98.25 31.16,98.23 31.94,97.45 33.06,95.21 33.32,94.58 33.43,93.86 33.43,93.73 33.43,93.48 VALVES.7
N$75  (via drill 0.4 pad 0.7)
  Top 0.5: LOADS&WATERFLOWMETER.7 96.93,93.48 96.93,93.73 96.93,93.86 96.74,94.04 96.56,94.23 94.89,94.68 94.26,94.68 93.47,94.68 92.72,94.18 91.47,93.2 91.02,92.75 90.03,91.77 89.9,91.44 89.9,90.81 89.9,89.41 90.03,89.08 v92.73,84.86
  Bottom 0.5: v92.73,84.86 93.68,84.26 94.43,83.51 94.44,83.49 94.81,71.31 94.81,68.81 94.72,68.36 88.93,45.59 88.93,43.3 88.72,42.26 87.45,37.16 87.44,37.11 86.32,29.3 83.85,22.25 83.44,21.26 83.4,21.21 81.91,19.71 80.21,18.04 79.75,17.85 76.01,16.95 76,16.95 73.94,16.95 73.92,16.95 73.25,17.12 71.55,17.12 70.94,16.87 69.08,15.85 67.32,14.21 SV1.18
N$76  (via drill 0.4 pad 0.7)
  Top 0.5: LOADS&WATERFLOWMETER.8 99.67,93.48 99.67,93.73 99.67,93.86 99.86,94.04 100.04,94.23 101.7,94.68 102.49,94.68 103.12,94.68 103.68,94.12 104.12,93.67 105.5,91.13 107.94,74.08 107.94,72.22 107.63,71.47 106.19,69.89 105.35,69.06 v94.05,59.59
  Bottom 0.5: v94.05,59.59 90.13,45.35 90.13,43.18 89.89,41.97 88.64,36.9 87.52,29.18 87.47,28.96 85,21.9 84.5,20.69 84.33,20.44 82.67,18.78 80.89,17.02 79.99,16.65 76.36,15.8 76.11,15.75 73.82,15.75 73.57,15.8 73.01,15.92 71.78,15.92 71.62,15.85 69.86,14.21 SV1.19
N$77  (via drill 0.4 pad 0.7)
  Top 0.5: LOADS&WATERFLOWMETER.6 93.67,92.96 93.42,92.96 93.29,92.96 92.1,92.14 91.66,91.69 91.1,91.13 91.1,90.5 91.1,89.72 94.03,85.4 94.03,85.39 94.03,84.33 94.03,84.31 v93.14,82.96
  Bottom 0.5: v93.14,82.96 93.6,71.19 93.6,68.92 93.56,68.71 87.77,45.94 87.73,45.72 87.73,43.42 87.55,42.55 86.3,37.51 86.24,37.23 85.12,29.54 82.66,22.52 82.41,21.91 81.2,20.71 79.53,19.06 79.51,19.05 75.76,18.15 74.17,18.15 73.52,18.31 73.45,18.32 71.34,18.32 71.28,18.31 70.29,17.9 68.4,16.87 66.54,15.85 64.78,14.21 SV1.17
N$78
  Top 0.5: SONAR&DHT.5 12.59,90.18 12.41,90.35 12.32,90.45 12.06,90.45 11.8,90.45 9.71,90.16 9.26,89.71 8.7,89.15 8.19,72.77 8.19,70.84 8.53,70.02 16.73,57.43 16.75,57.36 16.75,56.24 16.25,52.88 16.25,50.88 16.25,49.22 16.48,48.65 17.66,47.48 19.84,46.33 21.6,44.69 SV4.1
N$79
  Top 0.5: SONAR&DHT.4 13.47,87.07 13.72,87.07 13.85,87.07 14.03,86.89 14.22,86.7 14.67,85.04 17.95,57.6 17.95,56 17.45,52.65 17.45,50.65 17.45,49.46 17.5,49.33 18.34,48.5 20.52,47.35 22.38,46.33 24.14,44.69 SV2.20
N$80
  Top 0.5: NRF24.4 49.54,7.86 49.54,12.21 SV1.11
N$81
  Top 0.5: NRF24.8 59.7,7.86 59.7,12.21 SV1.15
N$82
  Top 0.5: NRF24.3 47,5.86 48.76,4.21 48.92,4.15 59.08,4.15 60.31,4.15 60.48,4.21 61.34,5.08 61.41,5.25 62.24,12.21 SV1.16
N$83
  Top 0.5: R33.2 24.14,17.61 24.14,17.36 24.14,14.21 SV1.1
N$84
  Top 0.5: R32.2 21.65,27.77 21.65,27.52 21.65,27.12 22.18,18.37 22.18,17.31 21.6,14.21 SV3.8
N$85
  Top 0.5: R34.2 61.23,47.37 60.98,47.37 60.65,47.37 60.18,46.9 59.7,44.69 SV2.6
N$86  (via drill 0.4 pad 0.7)
  Top 0.5: R36.2 52.5,17.07 52.75,17.07 53.15,17.07 56.83,19.29 57.63,20.08 57.66,20.15 57.79,21.88 57.79,22.21 57.79,22.46 C2.1 58.34,23.11 58.59,23.11 58.97,23.11 59.63,23.24 59.97,23.24 60.22,23.24 R38.2 61.02,22.69 61.02,22.44 61.02,22.04 61.57,21.49 73.25,17.12 73.86,16.87 75.06,15.67 75.51,14.82 75.52,14.8 75.52,13.74 75.51,13.73 v74.21,12.16
  Bottom 0.5: v74.21,12.16 74.11,11.6 74.04,11.43 73.17,10.56 73.01,10.49 67.72,9.57 67.55,9.5 65.79,7.86 PH&EC.4
N$87
  Top 0.5: R35.2 50.29,26.04 50.54,26.04 50.87,26.04 51.61,25.78 51.94,25.78 52.19,25.78 C3.1 53.49,25.78 53.74,25.78 54.07,25.78 54.08,25.8 54.45,25.86 54.7,25.86 R37.2 55.25,26.66 55.25,26.91 55.25,27.24 55.72,27.71 56.85,27.86 57.64,27.86 59.24,27.86 62.74,27.79 63.22,27.59 64.32,26.49 70.52,20.29 71.27,19.54 74.5,17.9 74.56,17.86 76.05,16.37 76.09,16.32 76.53,15.5 76.72,15.04 76.72,13.51 76.53,13.05 75.5,11.61 74.75,10.86 74.74,10.86 70.26,9.57 70.09,9.5 68.33,7.86 PH&EC.3
N$88  (via drill 0.4 pad 0.7)
  Top 0.5: R35.1 49.49,22.69 49.49,22.44 49.49,22.04 v46.65,17.49
  Bottom 0.5: v46.65,17.49 47,14.21 SV1.10
N$89
  Top 0.5: R36.1 48.6,16.97 48.35,16.97 47.96,16.97 47.19,16.2 47.17,16.19 46.38,15.92 46.22,15.85 44.46,14.21 SV1.9
N$90
  Bottom 0.5: CO2.1 102.85,43.69 107.97,43.94 L7806.OUT
N$91  (via drill 0.4 pad 0.7)
  Top 0.5: v45.1,18.02 41.14,15.85 39.38,14.21 SV1.7 | CO2.2 100.85,46.23 99.21,44.47 99.14,44.3 95.07,22.78 95.01,22.65 94.18,21.81 94.05,21.76 v78.98,20.36
  Bottom 0.5: v78.98,20.36 75.53,19.35 74.41,19.35 73.87,19.46 73.57,19.52 71.22,19.52 70.93,19.46 59.58,16.91 57.23,16.86 55.17,16.86 55.16,16.86 47.17,18.79 46.12,18.79 46.1,18.79 v45.1,18.02
VT1
  Top 0.5: R5.1 42.55,85.54 43.15,85.87 43.55,85.87 43.96,85.73 44.21,85.73 R7.1 45.71,85.73 45.96,85.73 46.24,85.84 46.25,85.85 46.46,85.85 46.71,85.85 VT1.3
VT2
  Top 0.5: R8.1 43.35,77.67 43.6,77.67 43.96,77.59 44.21,77.59 R10.1 47.08,78.17 VT2.3
VT4
  Top 0.5: R15.1 42.59,66.24 42.84,66.24 43.14,66.01 43.91,65.23 44.21,65.15 44.46,65.15 R17.1 45.96,65.15 46.21,65.15 46.59,65.79 46.59,66.2 46.81,66.43 46.97,66.55 47.22,66.55 VT4.3
VT5
  Top 0.5: R18.1 80.18,85.17 81.04,84.71 R20.1 82.54,84.71 82.79,84.71 83.12,84.71 84.68,84.98 VT5.3
VT6
  Top 0.5: R21.1 80.18,76.4 80.43,76.4 80.79,76.32 81.04,76.32 R23.1 82.54,76.32 84.31,76.77 VT6.3
VT7
  Top 0.5: R24.1 79.63,72.59 80.28,72.8 80.58,72.8 80.79,72.59 80.79,72.52 81.04,72.52 R26.1 82.54,72.52 82.79,72.52 83.07,72.4 83.84,71.88 84.05,71.88 84.3,71.88 VT7.3
VT8
  Top 0.5: VT8.3 84.81,64.52 84.56,64.52 84.35,64.52 82.79,64.39 82.54,64.39 R29.1 81.04,64.39 80.79,64.39 80.46,64.39 80.04,64.67 79.67,64.72 79.42,64.72 R27.1